# Altium PCB Pcb_OpenCarTracker_v1.0.PcbDoc
Units mil, origin at the board's own origin, x right, y up, seen from the top; angles counter-clockwise.
Board outline 3832.68 x 4503.94 mil, 2 copper layers (Top Layer, Bottom Layer); 15 components, 11 nets, 64 pads, 1 vias.
Unrouted connection lines stored in the file: 16.
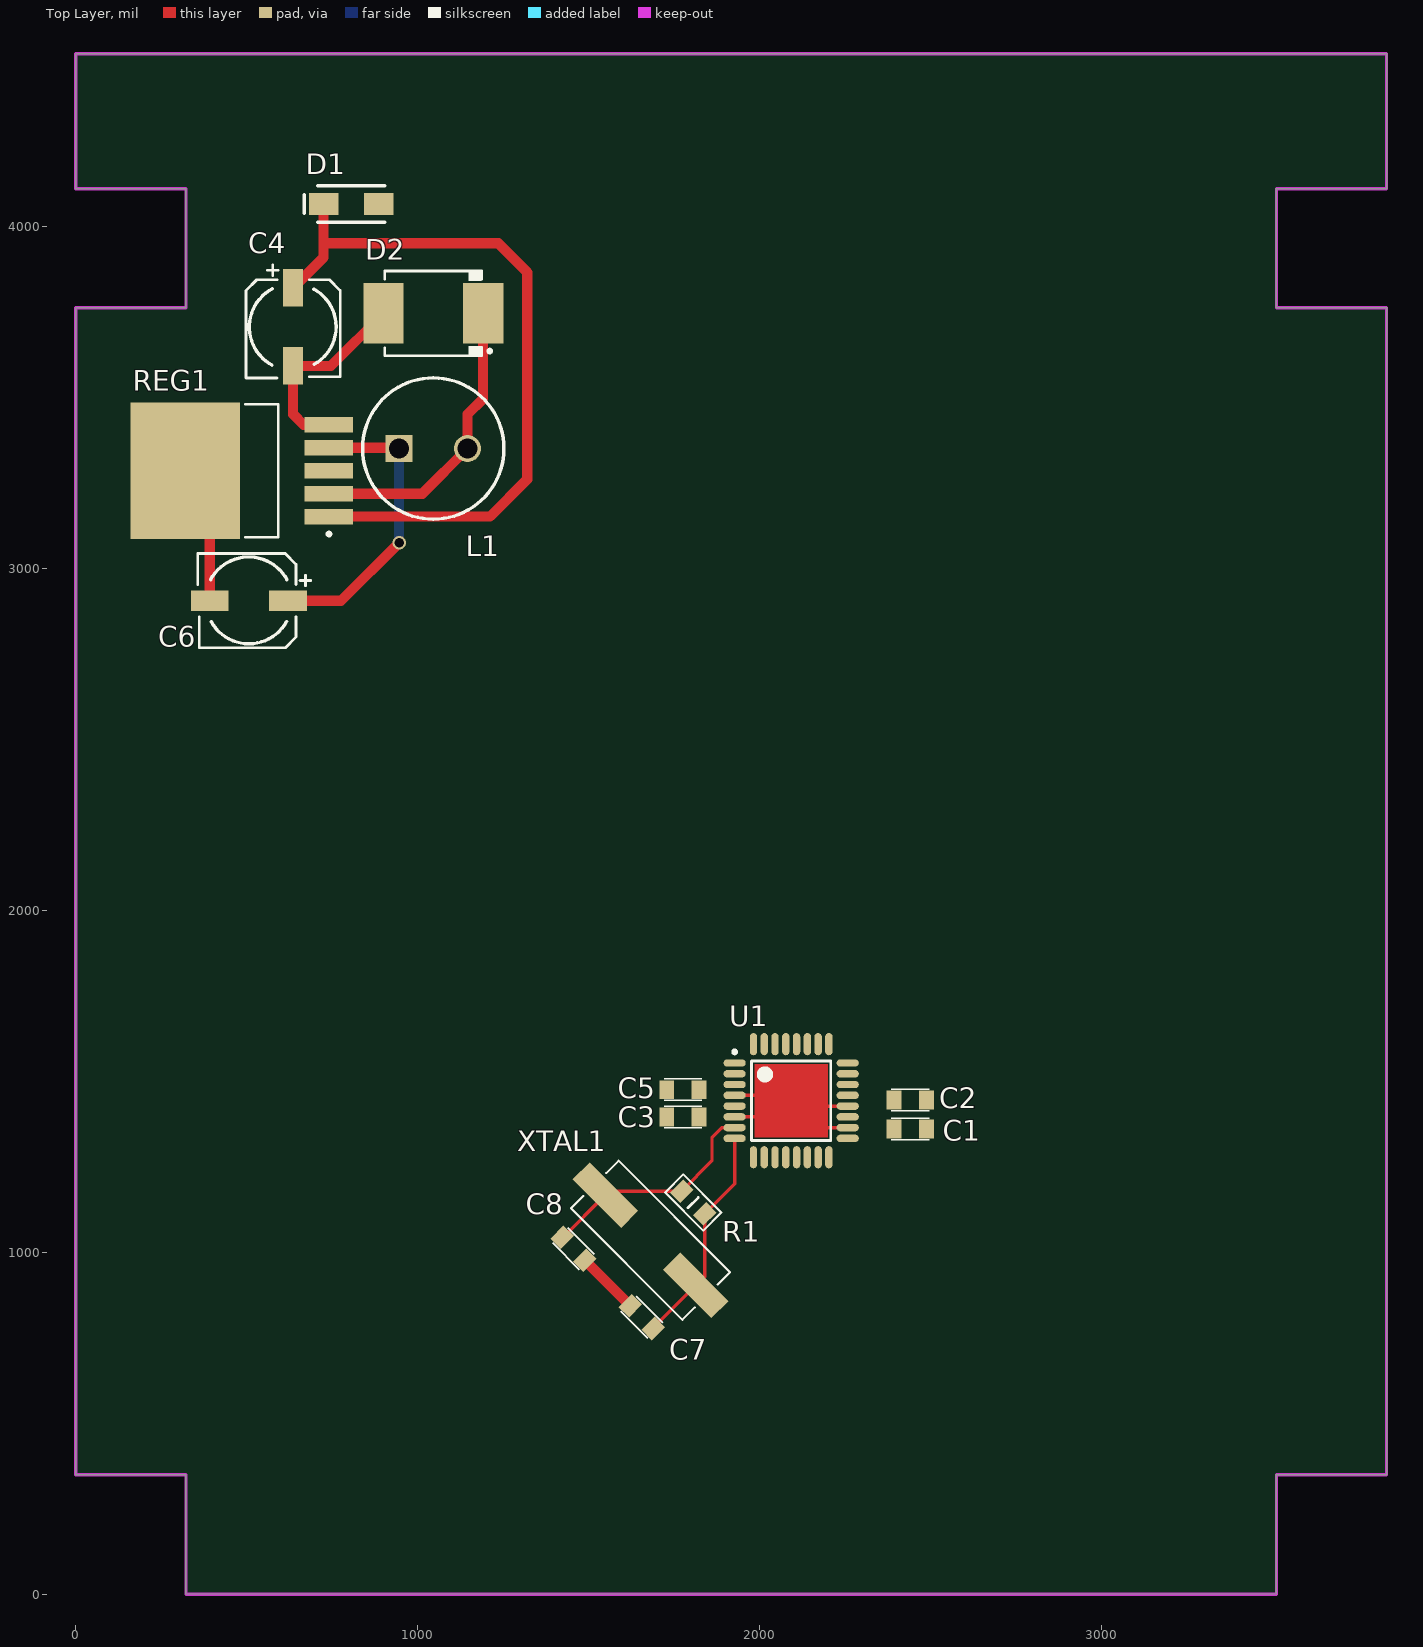
[diagram p0: Top Layer view]
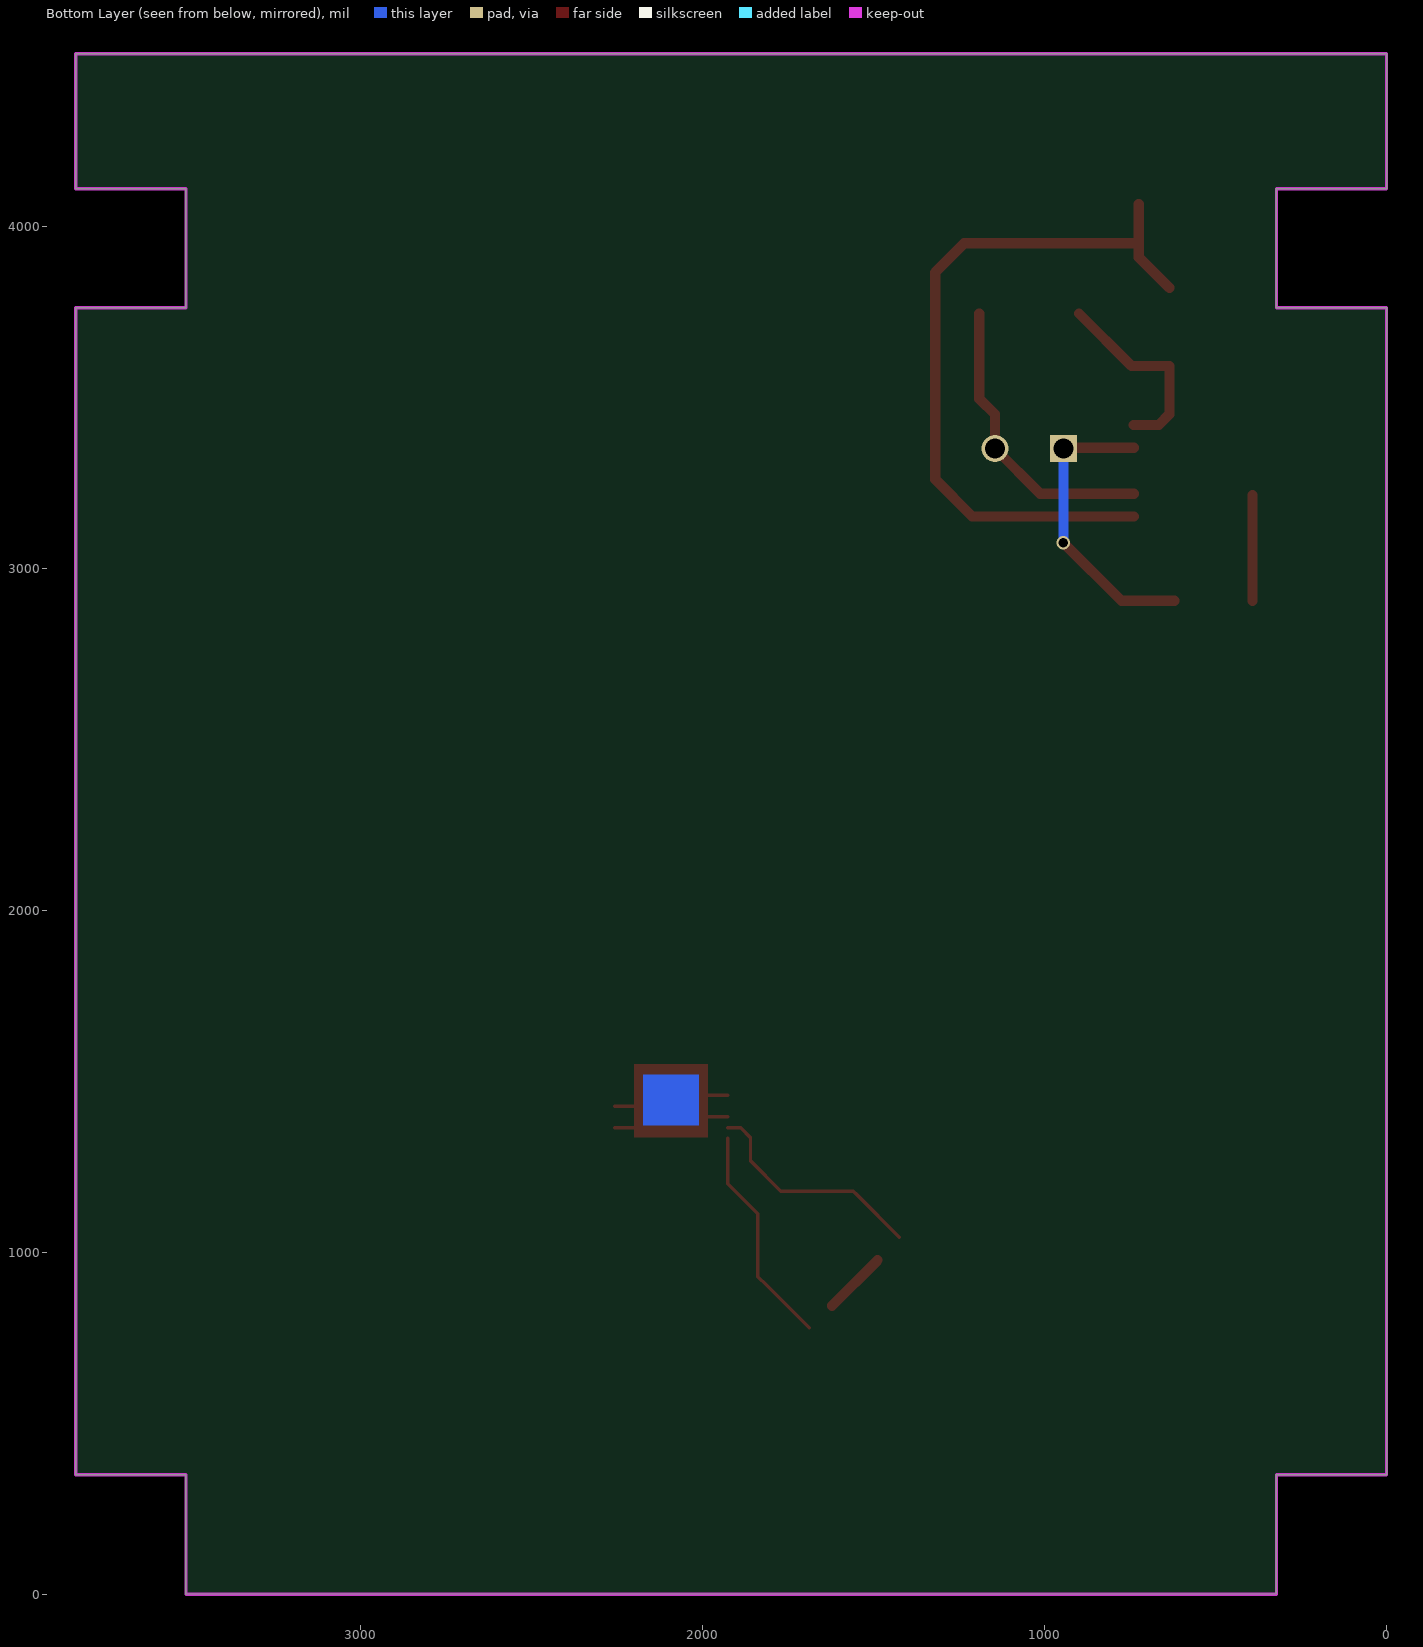
[diagram p1: Bottom Layer view, seen from below]
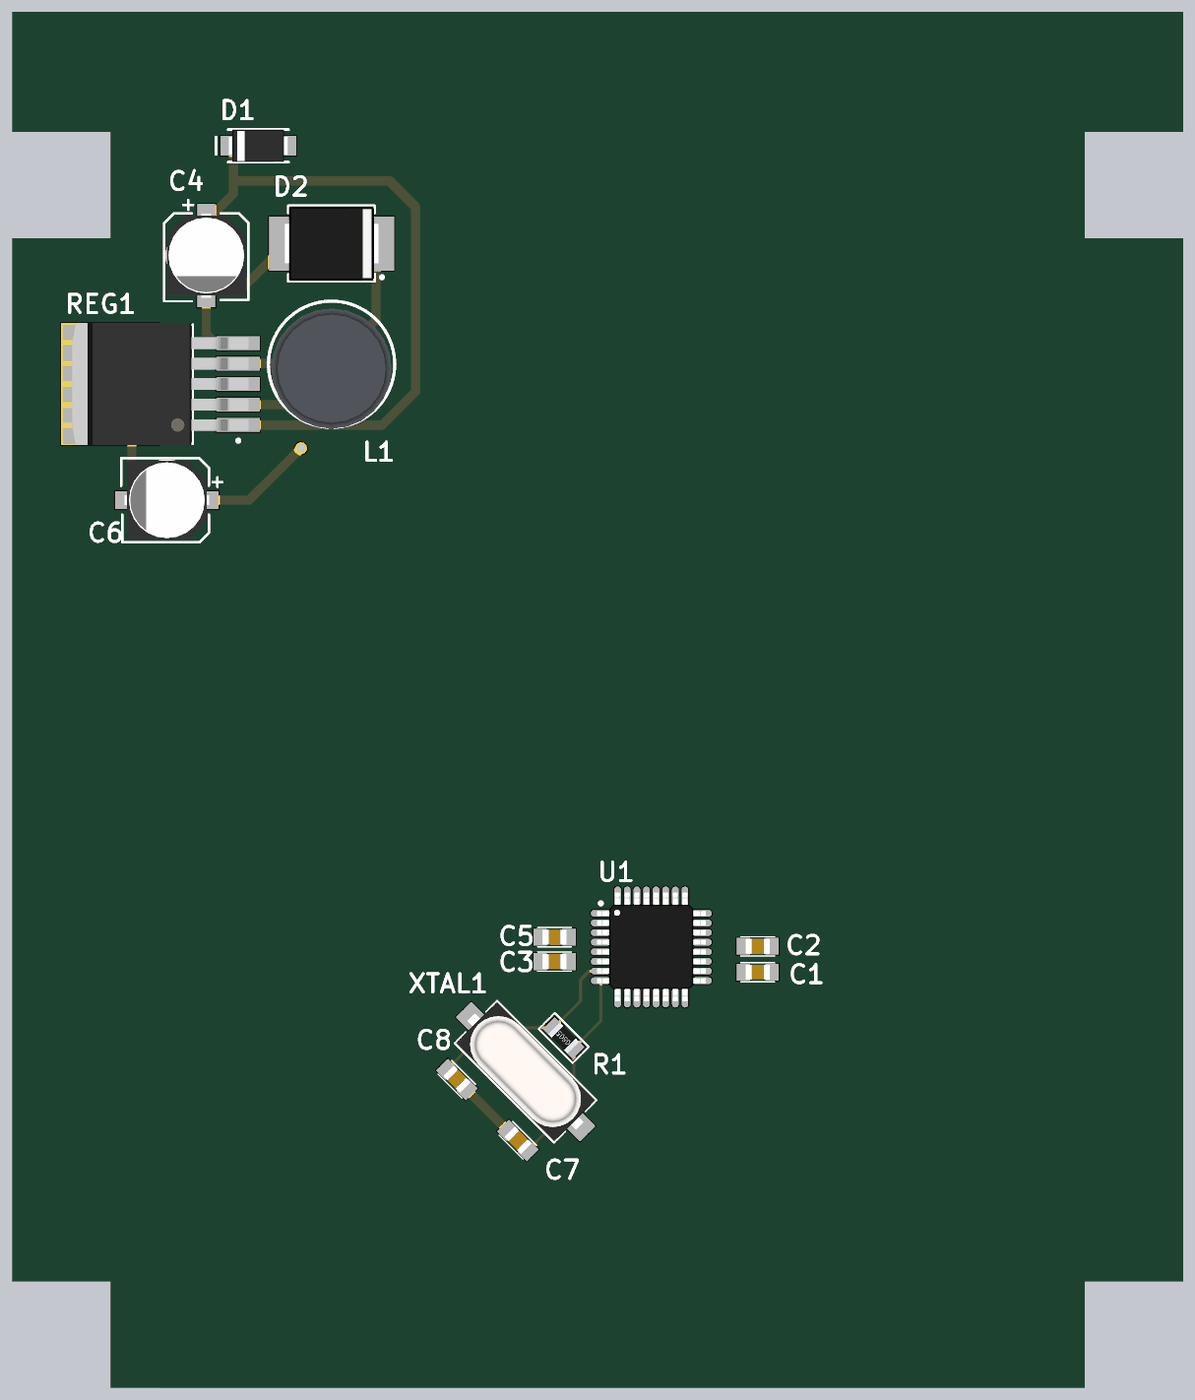
[diagram p2: 3D render of the assembled board from above, using the file's embedded part models]

## Layer stack, top to bottom
Top Solder: solder mask 0.4, Solder Resist, Dk 3.5
Top Layer: signal copper 1.4
Dielectric1: dielectric 12.6, FR-4, Dk 4.8
Bottom Layer: signal copper 1.4
Bottom Solder: solder mask 0.4, Solder Resist, Dk 3.5

## Board outline
321.85,0.51 321.85,348.94 0,348.94 0,3761.81 321.85,3761.81 321.85,4110.24 0,4110.24 0,4503.94 3832.68,4503.94 3832.68,4110.24 3510.83,4110.24 3510.83,3761.81 3832.68,3761.81 3832.68,348.94 3510.83,348.94 3510.83,0

## Design rules (kind name [scope] priority, off if disabled: settings)
Clearance Clearance_1 [All] p1: gap=8
Clearance PlanoTerra [(InPolygon)] p2: gap=14
HoleSize [All] p1: absolutevalues=TRUE maxlimit=393.7 minlimit=1 maxpercent=80.000 minpercent=20.000
HoleToHoleClearance [All] p1: gap=0 allowstackedmicrovias=TRUE
MinimumSolderMaskSliver [All] p1: minsoldermaskwidth=0
PlaneClearance [All] p1: clearance=30
PlaneConnect [All] p1: planeconnectstyle=Relief reliefexpansion=20 reliefentries=4 reliefconductorwidth=15 reliefairgap=25
PolygonConnect [All] p1: connectstyle=Relief reliefconductorwidth=35.43 reliefentries=4 polygonreliefangle="90 Angle" airgapwidth=7.87
RoutingVias [All] p1: holewidth=11.81 width=19.68 viastyle="Through Hole" minholewidth=11.81 minwidth=15.75 maxholewidth=393.7 maxwidth=393.7
SilkToSilkClearance [All] p1: silktosilkclearance=0
SilkToSolderMaskClearance [IsPad] p1: minsilkscreentomaskgap=0 clearancetoexposedcopper=TRUE
SolderMaskExpansion [All] p1: expansion=4
UnpouredPolygon [All] p1: allowunpoured=FALSE
Width [All] p1: maxlimit=1000 minlimit=10 preferedwidth=11.02 minimp=50.000000 maximp=50.000000 favimp=50.000000
22 further rules are at their usual default settings.

## Classes and differential pairs
component class Sch_: C1 C2 C3 C4 C6 C7 C8 D1 L1 R1 REG1 U1 XTAL1

## Components (designator, comment, footprint, x,y, rotation, side; value= is the part's Value field where it differs from the comment)
C1 "Capacitor SMD" CAP_0805 2440,1360 r180 top
C2 "Capacitor SMD" CAP_0805 2440,1445 r180 top
C3 "Capacitor SMD" CAP_0805 1775,1395 r0 top
C4 "Capacitor Eletrolitico" "CAPACITOR ELETROLITICO SMD" 635,3820 r0 top
C5 "Capacitor SMD" CAP_0805 1775,1475 r0 top
C6 "Capacitor Eletrolitico" "CAPACITOR ELETROLITICO SMD" 620,2905 r270 top
C7 "Capacitor SMD" CAP_0805 1655,810 r315 top
C8 "Capacitor SMD" CAP_0805 1455,1010 r135 top
D1 "DIODO_SS14_S1D" DO214AC 805,4065 r180 top
D2 "SS34" DO214AB 1045,3745 r0 top
L1 "Indutor_700mA" "INDUTOR RADIAL 10.5MM" 945,3350 r0 top
R1 "Resistor SMD" RES_0805 1805,1145 r135 top
REG1 "LM2576" TO-263-5 485,3285 r180 top
U1 "ATmega328-AU" TQFP32 2091.65,1442.8 r0 top
XTAL1 "CRISTAL-SMD-HC49S" "Cristal HC49S" 1680,1035 r135 top

## Footprints (in the part's own frame and the unit in brackets; to place one, negate y for a bottom-side part, rotate by r counter-clockwise, add the part's x,y. Pads: shape width x height; smd on the part's side, far side on the other; paste and mask are expansions set on the pad)
CAP_0805 [mm]
  rect 1.1x1.4 smd: 1(-1.2,0) 2(1.2,0)
  silkscreen extent -1.4,-0.8 1.4,0.8, body extent -1,-0.62 1,0.63, height 1
"CAPACITOR ELETROLITICO SMD" [mm]
  rect 1.5x2.8 smd: 1(0,0) 2(0,-5.8)
  silkscreen extent -3.5,-6.7 3.5,1.7, body extent -3.3,-6.4 3.3,0.6, height 8.11
"Cristal HC49S" [mm]
  rect 5.1x1.8 smd: 1(-4.76,0) 2(4.74,0)
  silkscreen extent -5.86,-2.5 5.84,2.5, body extent -6.4,-2.41 6.4,2.42, height 4.3
DO214AB [mm] "Diodo SMD package SMC - DO214AB"
  rect 3x4.5 smd: 1(-3.7,0) 2(3.7,0)
  silkscreen extent -3.6,-3.15 4.32,3.15, body extent -4.07,-3.12 4.08,3.12, height 1.43
DO214AC [mm]
  rect 2.2x1.65 smd: 1(2.05,0) 2(-2.05,0)
  silkscreen extent -2.5,-1.35 3.5,1.35, body extent -2.5,-1.35 2.5,1.35, height 2.15
"INDUTOR RADIAL 10.5MM" [mm]
  rect 2x2 hole 1.5: 1(0,0)
  round 2 hole 1.5: 2(5.08,0)
  silkscreen extent -2.71,-5.25 7.79,5.25, body extent -2.46,-5.37 7.54,4.63, height 12.03
RES_0805 [mm]
  rect 1.1x1.4 smd: 1(-1.2,0) 2(1.2,0)
  silkscreen extent -2,-0.95 2,0.95, body extent -1.15,-0.67 1.15,0.68, height 0.75
TO-263-5 [mm] "D2-PAK, 6-Pads, Body 8,9x9,9mm (max), IPC Low Density"
  rect 3.6x1.15 smd: 1(-6.45,3.4) 2(-6.45,1.7) 3(-6.45,0) 4(-6.45,-1.7) 5(-6.45,-3.4)
  rect 8.1x10.15 smd paste-5: 3(4.2,0)
  silkscreen extent -6.6,-4.95 -0.25,4.95, body extent -7.31,-5.08 7.33,5.08, height 4.57
TQFP32 [mm] "Thin QFP, 32-Leads, Body 7x7mm, Pitch 0.8mm, IPC Medium Density"
  oval 1.65x0.55 smd: 1(-4.2,2.8) 2(-4.2,2) 3(-4.2,1.2) 4(-4.2,0.4) 5(-4.2,-0.4) 6(-4.2,-1.2) 7(-4.2,-2) 8(-4.2,-2.8) 17(4.2,-2.8) 18(4.2,-2) 19(4.2,-1.2) 20(4.2,-0.4) 21(4.2,0.4) 22(4.2,1.2) 23(4.2,2) 24(4.2,2.8)
  oval 0.55x1.65 smd: 9(-2.8,-4.2) 10(-2,-4.2) 11(-1.2,-4.2) 12(-0.4,-4.2) 13(0.4,-4.2) 14(1.2,-4.2) 15(2,-4.2) 16(2.8,-4.2) 25(2.8,4.2) 26(2,4.2) 27(1.2,4.2) 28(0.4,4.2) 29(-0.4,4.2) 30(-1.2,4.2) 31(-2,4.2) 32(-2.8,4.2)
  silkscreen extent -4.32,-2.95 2.95,3.75, body extent -4.51,-4.51 4.51,4.51, height 1.1

## Part data
D1: library part "SS14 Schottky Diode", "Diodo SMD Shottky"
D2: "DIODO-SCHOTTKY-SMD 3A 40V"
L1: "IND200-CIRC"
REG1: "Regulador de Tensão LM2576"
U1: "8-bit AVR Microcontroller, 32KB Flash, 1KB EEPROM, 2KB SRAM, 32-pin TQFP, Industrial Grade (-40°C to 85°C)"

## Via types
v1: diameter 39.37, hole 27.56, Top Layer to Bottom Layer, 1 vias

## Nets (pads, with @x,y where several pads share a name; then routed paths per layer and width w, separated by ;. In a path a pad name is that pad's centre, name@x,y a point inside that pad or via, vN(x,y) a via of type N, cw(c..) or ccw(c..) an arc to the next point about the centre after c; other vN are vias at no path point)
+5V: C1.2 C2.2 C3.2 C5.2 C6.1 L1.1 REG1.4 U1.4 U1.6 U1.18 U1.20 | length 1185.1
  Top Layer w10: U1.6 2004.45,1395.55 ; U1.4 2008.54,1458.54 ; 2180.95,1364.05 U1.18 ; 2182.95,1427.05 U1.20
  Top Layer w30: C6.1 775,2905 v1(945,3075) ; REG1.4 L1.1@943.07,3351.93
  Bottom Layer w30: v1(945,3075) L1.1
GND: C1.1 C2.1 C3.1 C4.2 C5.1 C6.2 C7.1 C8.1 D2.1 REG1.3 REG1.5 U1.3 U1.5 U1.21 | length 1082.7
  Top Layer w30: C6.2 REG1.3@391.65,3212.99 ; REG1.5 666.14,3418.86 635,3450 C4.2 745.98,3591.65 D2.1 ; C8.1 C7.1
NetC4_1: C4.1 D1.1 REG1.1 | length 2144.1
  Top Layer w30: C4.1 724.29,3909.29 D1.1 ; 724.29,3950 1235,3950 1320,3865 1320,3260 1211.14,3151.14 REG1.1
NetC7_2: C7.2 R1.1 U1.8 XTAL1.1 | length 652.7
  Top Layer w10: C7.2@1688.41,778.38 XTAL1.1 1838.41,928.38 R1.1 1926.3,1199.49 U1.8
NetC8_2: C8.2 R1.2 U1.7 XTAL1.2 | length 674.6
  Top Layer w10: C8.2@1424.49,1043.41 XTAL1.2 1559.49,1178.41 R1.2 1860,1266.81 1860,1335 1889.05,1364.05 U1.7
NetD2_2: D2.2 L1.2 REG1.2 | length 874.6
  Top Layer w30: REG1.2 1013.07,3218.07 L1.2 1145,3450 1190.67,3495.67 D2.2
NetU1_1: U1.1
NetU1_2: U1.2
NetU1_11: U1.11
NetU1_12: U1.12
VCC: D1.2
pads on no net: U1.9 U1.10 U1.13 U1.14 U1.15 U1.16 U1.17 U1.19 U1.22 U1.23 U1.24 U1.25 U1.26 U1.27 U1.28 U1.29 U1.30 U1.31 U1.32

## Keep-outs
Keep-Out Layer:
  lines w10: 321.85,0 3510.83,0 ; 321.85,0.51 321.85,348.94 0,348.94 0,3761.81 321.85,3761.81 321.85,4110.24 0,4110.24 0,4503.94 3832.68,4503.94 3832.68,4110.24 3510.83,4110.24 3510.83,3761.81 3832.68,3761.81 3832.68,348.94 3510.83,348.94 3510.83,0.51

## Other copper
Top Layer:
  rectangle net +5V: 1985,1335 2200,1550
Bottom Layer:
  rectangle net GND: 2010,1370 2175,1520